# EAGLE board board_slave1_ammonia (EAGLE 9.6.2)
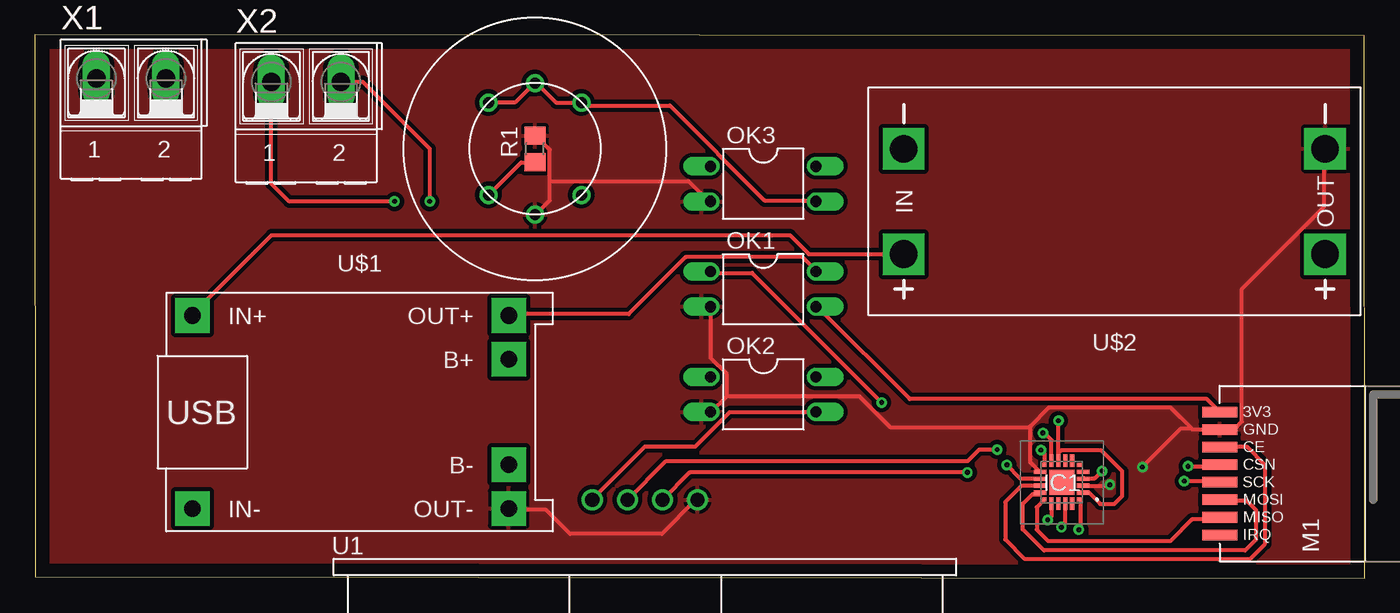
[diagram p0: board, top side]
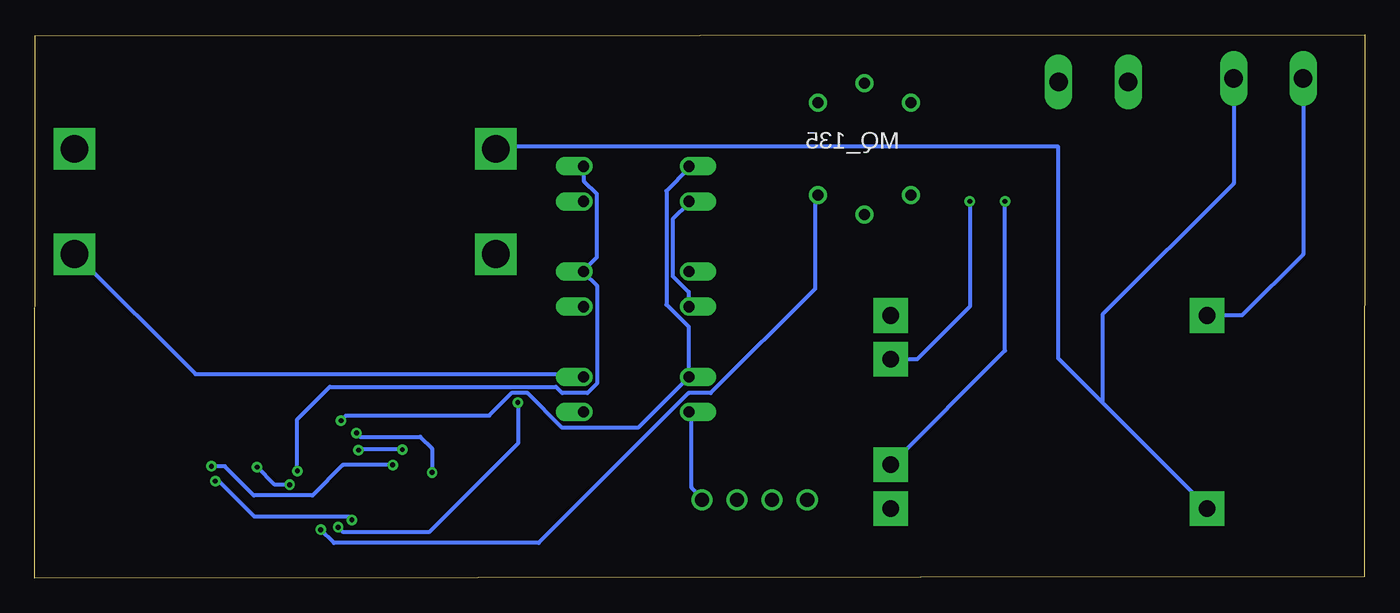
[diagram p1: board, bottom side, seen from below]

Size 96.22 x 39.34 mm. Coordinates in mm from the lower left corner, seen from the top.
Outline: 0.04,0.1 96.22,0 96.19,39.24 0,39.34 0.04,0.1
Copper layers (1*16): Top 0.035mm / dielectric 1.5mm / Bottom 0.035mm
Design rules "default": minimum track width 6mil, minimum drill 0.35mm, track to track 6mil, track to pad 6mil, pad to pad 6mil, via to via 6mil, smd to smd 6mil, copper to edge 40mil, drill to drill 6mil, minimum pad ring 10mil, minimum via ring 8mil, stop-mask expansion 4mil, vias tented up to drill 0mil, thermal gap 10mil
Net classes: 0 default: width 0.305 mm

## Footprints (pad centres in the part's own frame; a part is rotated, then mirrored left to right if it is on the bottom)
EFM8BB10F2GAQFN20R = smd 0.3 x 0.3: 1 -1.25,1.25; 6 -1.25,-1.25; 11 1.25,-1.25; 16 1.25,1.25 | smd 0.9 x 0.3: 2 -1.55,0.75; 3 -1.55,0.25; 4 -1.55,-0.25; 5 -1.55,-0.75; 12 1.55,-0.75; 13 1.55,-0.25; 14 1.55,0.25; 15 1.55,0.75 | smd 0.3 x 0.9: 7 -0.75,-1.55; 8 -0.25,-1.55; 9 0.25,-1.55; 10 0.75,-1.55; 17 0.75,1.55; 18 0.25,1.55; 19 -0.25,1.55; 20 -0.75,1.55 | smd 1.8 x 1.8: 21 0,0
WIRELESS-NRF24L01-SMD = smd 2.54 x 0.762: 1 1.27,0; 2 1.27,1.27; 3 1.27,2.54; 4 1.27,3.81; 5 1.27,5.08; 6 1.27,6.35; 7 1.27,7.62; 8 1.27,8.89
DIL04 = drill 0.813 offset: 1 -1.27,-3.81; 2 1.27,-3.81; 3 1.27,3.81; 4 -1.27,3.81
R0805 = smd 1.3 x 1.5: 1 -0.95,0; 2 0.95,0
XCVR_HC-SR04 = drill 1.02: 1 -3.81,0; 2 -1.27,0; 3 1.27,0; 4 3.81,0
BATTERY-CHARGER-LI-PROT = drill 1.2 pad 2.5 square: B+ 10.795,3.81; B- 10.795,-3.81; IN+ -12.065,6.985; IN- -12.065,-6.985; OUT+ 10.795,6.985; OUT- 10.795,-6.985
DC-DC-STEP-UP-MT3608 = drill 2 pad 2.8 square: IN+ 15.24,3.81; IN- 15.24,-3.81; OUT+ -15.24,3.81; OUT- -15.24,-3.81
MQ-135 = drill 0.8: A$1 -3.36,3.35; A$2 -3.36,-3.35; B$1 3.36,3.35; B$2 3.36,-3.35; H$1 0,4.75; H$2 0,-4.75
AK500/2-H = drill 1.321 long: 1 -2.515,0; 2 2.515,0

## Placement (x,y rotation side)
IC1  EFM8BB10F2G-A-QFN20R  [EFM8BB10F2GAQFN20R]  74.3,6.95 180 top
M1  WIRELESS-NRF24L01SMD  [WIRELESS-NRF24L01-SMD]  84.46,3.14 0 top
OK1  PC817  [DIL04]  52.71,20.92 270 top
OK2  PC817  [DIL04]  52.71,13.3 270 top
OK3  PC817  [DIL04]  52.71,28.54 270 top
R1  [R0805]  36.2,31.08 90 top
U1  HC-SR04  [XCVR_HC-SR04]  44.15,5.68 0 top
U$1  BATTERY-CHARGER-LI-PROT  [BATTERY-CHARGER-LI-PROT]  23.5,12.03 0 top
U$2  DC-DC-STEP-UP-MT3608  [DC-DC-STEP-UP-MT3608]  78.11,27.27 180 top
U$3  MQ_135_A  [MQ-135]  36.2,31.08 0 top
X1  [AK500/2-H]  6.99,36.16 0 top
X2  [AK500/2-H]  19.64,35.92 0 top

## Library data of the parts
IC1 = SamacSys_Parts; DESCRIPTION: 8-bit Microcontrollers - MCU 8051 25 MHz 2 kB fla sh 0.25 kB RAM 8-bi; HEIGHT: 0.8mm; MANUFACTURER_NAME: Silicon Labs; MANUFACTURER_PART_NUMBER: EFM8BB10F2G-A-QFN20R; MOUSER_PART_NUMBER: 634-8BB10F2GAQF20R; MOUSER_PRICE-STOCK: https://www.mouser.co.uk/ProductDetail/Silicon-Labs/EFM8BB10F2G-A-QFN20R?qs=DCjbIwhU0ZtADu%252B55HsWtA%3D%3D
M1 = nrf24l01plus
OK1-OK3 = optocoupler; MPN: PC817X4J000F; OC_FARNELL: 9707727; OC_NEWARK: 97K7059
R1 = rcl; SPICEPREFIX: R
U1 = HC-SR04; AVAILABILITY: In Stock; DESCRIPTION: HC-SR04 Ultrasonic Sensor Qwiic Platform Evaluation Expansion Board; MF: SparkFun Electronics; MP: HC-SR04; PACKAGE: None; PRICE: None; PURCHASE-URL: https://pricing.snapeda.com/search/part/HC-SR04/?ref=eda
U$1 U$2 = diy-modules_1
U$3 = MQ135
X1 X2 = con-ptr500; OC_FARNELL: unknown; OC_NEWARK: unknown

## Nets
5V_: OK2.4 U$2.OUT+
GND: IC1.3 IC1.12 M1.7 OK1.2 OK2.2 OK3.2 R1.2 U1.4 U$1.OUT- U$2.OUT- U$3.H$2
HC_TRIG: IC1.2 IC1.9 OK2.1 OK3.1
IN+: U$1.IN+ U$2.IN+ X1.1
IN-: U$1.IN- U$2.IN- X1.2
MQ135_SUPPLY: OK3.3 U$3.A$1 U$3.B$1 U$3.H$1
N$1: U$1.B+ X2.2
N$2: U$1.B- X2.1
N$3: IC1.17 M1.4
N$4: IC1.16 M1.2
N$5: IC1.15 M1.3
N$6: IC1.14 M1.6
N$7: IC1.13 M1.5
N$8: IC1.19 OK1.1
N$9: OK2.3 U1.1
N$10: IC1.11 U1.2
N$11: IC1.10 U1.3
N$13: R1.1 U$3.A$2
N$14: IC1.1 U$3.B$2
VCC: IC1.4 OK1.4 OK3.4 U$1.OUT+
VIN_NRF: M1.8 OK1.3

## Tracks (layer width: path | path; a pad name or v marks a point on that pad's centre or on a via)
5V_
  Bottom 0.305: OK2.4 56.69,14.77 84.58,14.77 93.27,23.46 U$2.OUT+
GND  (via drill 0.35)
  Top 0.305: 37.26,28.72 37.26,27.34 36.35,26.43 U$3.H$2 | 37.26,28.72 37.26,31 36.35,31.92 R1.2 | 37.26,28.72 47.32,28.72 48.69,27.34 OK3.2 | U$1.OUT- 34.29,4.94 37.01,4.94 38.74,3.21 45.37,3.21 47.78,5.63 U1.4 | 50.06,13.17 50.06,14.77 48.92,15.91 48.92,19.57 OK1.2 | 50.06,13.17 48.92,12.03 OK2.2 | 72.01,10.89 72.01,8.37 72.7,7.69 IC1.12 | U$2.OUT- 93.27,31 93.27,26.89 87.33,20.94 87.33,11.34 86.87,10.89 85.73,10.89 M1.7 83.76,10.76 83.69,10.83 | 50.06,13.17 59.67,13.17 61.95,10.89 72.01,10.89 | 72.01,10.89 72.01,11 73.36,12.35 82.17,12.35 83.69,10.83 | IC1.3 77.71,6.7 v77.77,6.76 | v80.13,8.05 82.92,10.83 83.69,10.83
  Bottom 0.305: OK1.2 48.92,19.8 48.92,20.72 50.06,21.86 50.06,25.97 48.92,27.12 OK3.2 | OK2.2 48.69,12.03 48.69,6.54 48.01,5.86 U1.4 | v77.77,6.76 78.85,6.76 v80.13,8.05
  pour Top (isolate 0.305): 0.64,38.7 95.89,38.7 95.89,0.6 0.64,0.6
HC_TRIG  (via drill 0.35)
  Top 0.305: 74.07,9.06 74.3,9.29 77.11,9.29 78.67,7.73 78.67,5.95 78.09,5.37 77.08,5.37 76.25,6.2 IC1.2 | 74.07,9.06 74.07,8.6 IC1.9 | 74.07,9.06 74.07,11.39 v74.06,11.4
  Bottom 0.305: OK3.1 48.92,29.63 50.52,28.03 50.52,19.8 48.92,18.2 48.92,14.77 OK2.1 52.58,10.89 58.07,10.89 60.58,13.4 61.72,13.4 63.35,11.77 73.68,11.77 v74.06,11.4
IN+
  Top 0.305: U$1.IN+ 11.43,19.12 17.15,24.83 54.64,24.83 56.01,23.46 U$2.IN+
  Bottom 0.305: X1.1 4.47,23.43 8.89,19.01 U$1.IN+
IN-
  Bottom 0.305: U$1.IN- 11.43,5.17 18.99,12.73 | U$2.IN- 62.87,31.23 22.18,31.23 22.18,15.91 18.99,12.73 | X1.2 9.5,28.56 18.99,19.08 18.99,12.73
MQ135_SUPPLY
  Top 0.305: U$3.A$1 32.92,34.43 34.75,34.43 36.12,35.8 U$3.H$1 36.35,35.8 37.72,34.43 U$3.B$1 39.78,34.2 45.95,34.2 52.81,27.34 56.47,27.34 OK3.3
N$1  (via drill 0.35)
  Top 0.305: X2.2 23.74,35.92 28.58,31.08 v28.58,27.27
  Bottom 0.305: v28.58,27.27 28.58,19.65 32.39,15.84 U$1.B+
N$2  (via drill 0.35)
  Top 0.305: v26.04,27.27 18.42,27.27 17.13,28.56 X2.1
  Bottom 0.305: U$1.B- 26.04,16.47 v26.04,27.27
N$3  (via drill 0.35)
  Top 0.305: IC1.17 73.55,4.49 v73.27,4.22 | v83.15,7.03 85.64,7.03 M1.4
  Bottom 0.305: v73.27,4.22 73.5,4.45 80.31,4.45 82.89,7.03 v83.15,7.03
N$4
  Top 0.305: M1.2 85.73,4.26 83.72,4.26 82.14,2.68 73.33,2.68 72.49,3.51 72.49,5.14 IC1.16
N$5
  Top 0.305: IC1.15 72.7,6.08 72.18,6.08 71.48,5.39 71.48,3.53 73.01,2 87.56,2 88.34,2.78 88.34,4.94 87.66,5.63 85.73,5.63 M1.3
N$6
  Top 0.305: IC1.14 71.39,6.7 70.2,5.51 70.2,2.8 71.59,1.42 87.94,1.42 89.02,2.49 89.02,8.17 87.7,9.49 M1.6
N$7  (via drill 0.35)
  Top 0.305: v70.32,8.2 71.32,7.2 72.62,7.2 72.63,7.19 72.65,7.2 IC1.13 | v83.43,8.1 85.61,8.1 M1.5
  Bottom 0.305: v70.32,8.2 73.93,8.2 76.13,6 80.37,6 82.47,8.1 v83.43,8.1
N$8  (via drill 0.35)
  Top 0.305: v61.27,12.71 51.89,22.09 48.92,22.09 OK1.1 | v74.27,3.69 74.55,3.97 IC1.19
  Bottom 0.305: v74.27,3.69 73.95,3.37 67.64,3.37 61.27,9.74 v61.27,12.71
N$9
  Top 0.305: OK2.3 50.29,12.03 47.8,9.54 44.14,9.54 40.46,5.86 U1.1
N$10  (via drill 0.35)
  Top 0.305: U1.2 45.68,8.48 67.5,8.48 68.33,9.31 v69.62,9.31 | v72.79,9.27 73.05,9.01 IC1.11
  Bottom 0.305: v69.62,9.31 72.75,9.31 v72.79,9.27
N$11  (via drill 0.35)
  Top 0.305: IC1.10 73.55,10 73.04,10.51 v72.94,10.51 | v67.47,7.65 47.39,7.65 U1.3
  Bottom 0.305: v72.94,10.51 72.67,10.24 68.32,10.24 67.47,9.39 v67.47,7.65
N$13
  Top 0.305: R1.1 36.12,30.09 35.21,30.09 32.92,27.8 U$3.A$2
N$14  (via drill 0.35)
  Top 0.305: v75.53,3.51 75.67,3.65 75.67,5.63 IC1.1
  Bottom 0.305: v75.53,3.51 74.57,2.55 59.77,2.55 48.92,13.4 47.32,13.4 39.78,20.94 39.78,27.57 U$3.B$2
VCC  (via drill 0.35)
  Top 0.305: IC1.4 75.9,7.23 76.68,7.23 v77.21,7.77 | U$1.OUT+ 34.29,19.12 42.98,19.12 47.09,23.23 55.55,23.23 56.47,22.32 OK1.4
  Bottom 0.305: OK3.4 56.47,29.63 56.47,28.72 55.55,27.8 55.55,23.23 56.47,22.32 OK1.4 56.47,22.09 55.55,21.17 55.55,14.09 56.24,13.4 58.07,13.4 58.52,13.86 74.87,13.86 77.21,11.51 v77.21,7.77
VIN_NRF
  Top 0.305: M1.8 84.79,12.96 63.31,12.96 56.69,19.57 OK1.3